# EAGLE board PCB-CCU-IRISCTRL_ETHERMEGA (EAGLE 7.1.0)
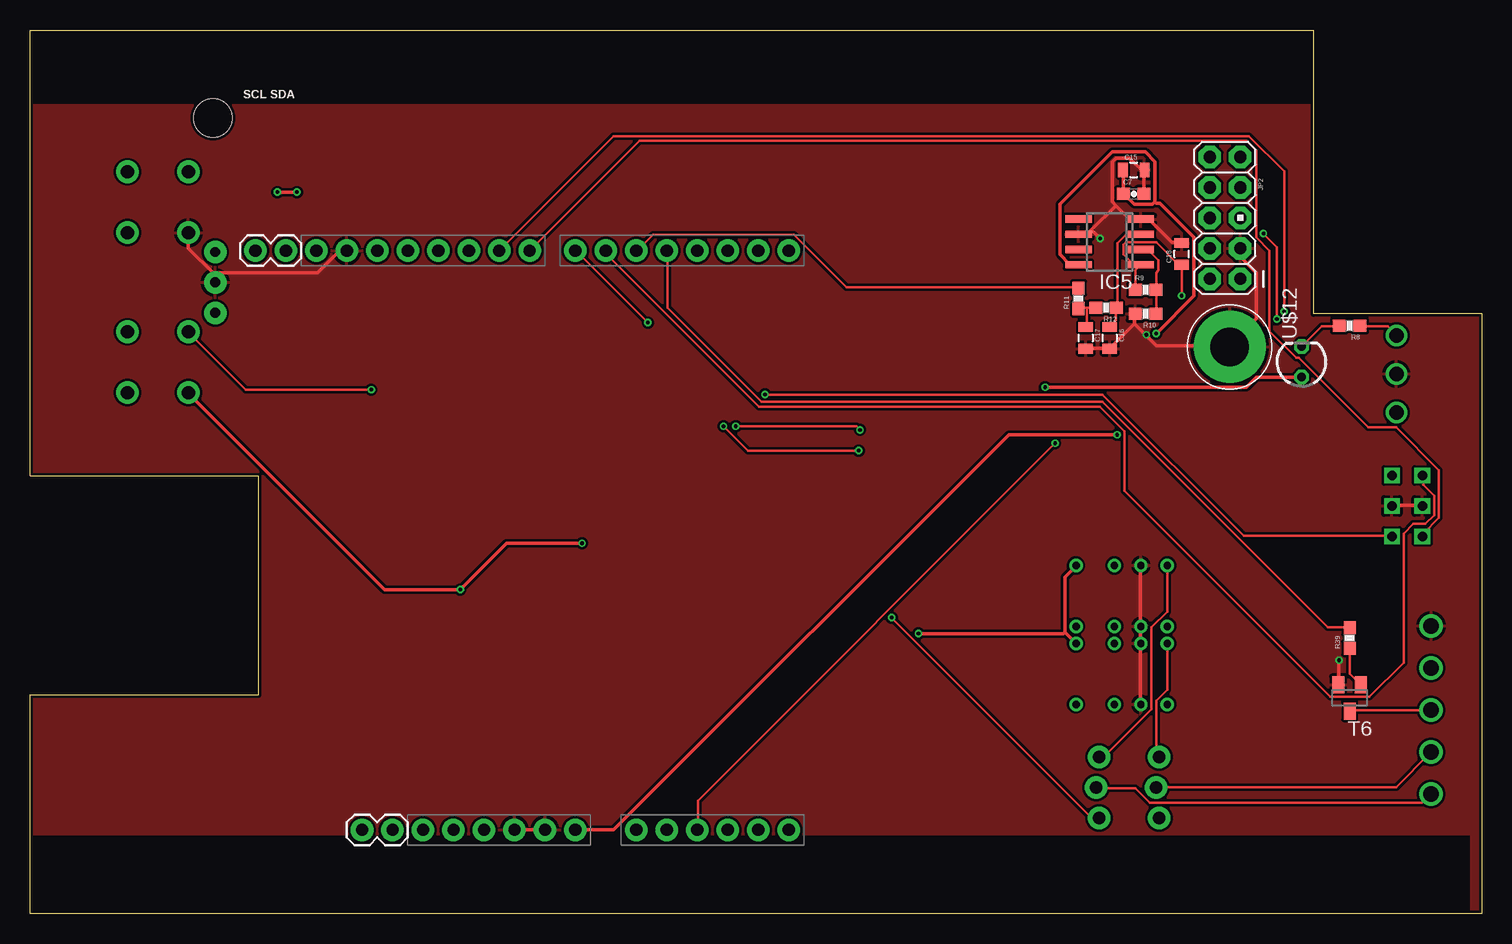
[diagram p0: board, top side]
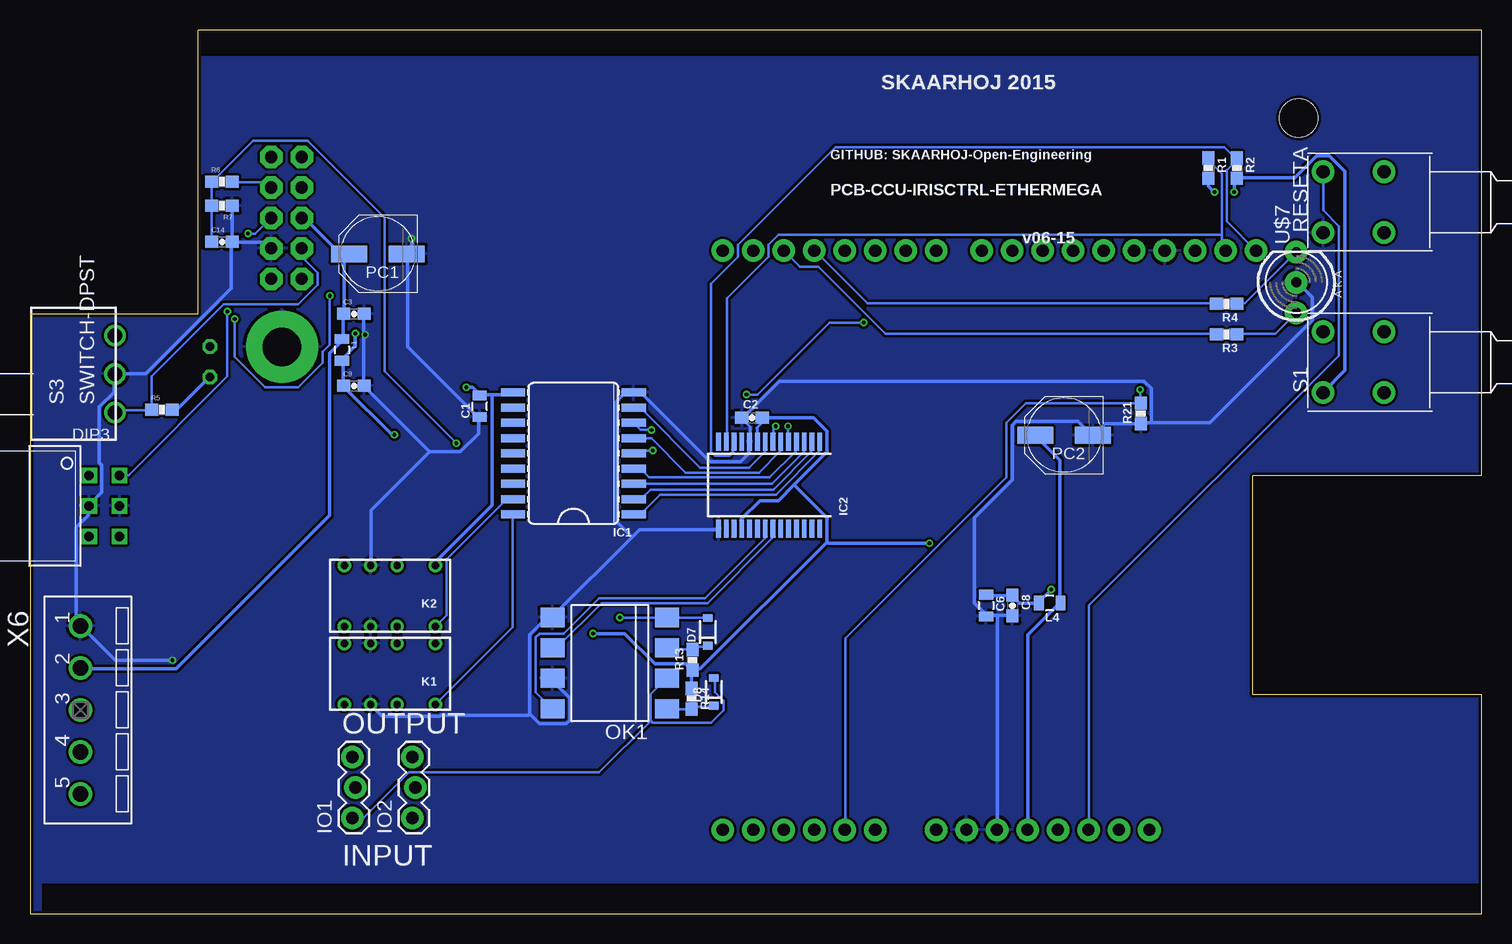
[diagram p1: board, bottom side, seen from below]

Size 121 x 73.66 mm. Coordinates in mm from the lower left corner, seen from the top.
Outline: 0,0 0,18.26 19.05,18.26 19.05,36.5 0,36.5 0,73.66 107,73.66 107,50 121,50 121,0 0,0
Copper layers (1*16): Top 0.035mm / dielectric 1.5mm / Bottom 0.035mm
Design rules "Fusion_eagle_rule_v1.1": minimum track width 6mil, minimum drill 12mil, track to track 6mil, track to pad 6mil, pad to pad 6mil, via to via 6mil, smd to smd 0mil, copper to edge 10mil, drill to drill 10mil, minimum pad ring 10mil, minimum via ring 6mil, stop-mask expansion 2mil, vias tented up to drill 100mil, thermal gap 10mil
Net classes: 0 default: width 0.203 mm, clearance 0.203 mm; 1 Power: width 0.305 mm, drill 0.305 mm, clearance 0.203 mm; 2 RELAY LINES: width 0.305 mm, drill 0.305 mm, clearance 0.203 mm; 3 INput lines: width 0.203 mm, clearance 0.203 mm
Holes 3.2 mm at 15.24,66.31
tRestrict: area 0,0 to 120,6.5; area 0,67.5 to 107,74
bRestrict: area 0,71.5 to 107,74; area 0,0 to 120,2.5

## Footprints (pad centres in the part's own frame; a part is rotated, then mirrored left to right if it is on the bottom)
0805 = smd 0.8 x 1.2: 1 -0.9,0; 2 0.9,0
0603-CAP = smd 1.1 x 1: 1 -0.85,0; 2 0.85,0
SOD-323 = smd 0.63 x 0.83: 1 -1.15,0; 2 1.15,0
P65SMT_UPRIGHT_TH = drill 0.8 square: P$1 -2.54,-1.27; P$2 0,-1.27; P$3 2.54,-1.27; P$4 2.54,1.27; P$5 0,1.27; P$6 -2.54,1.27
DUEMILANOVE_VIAS = drill 1.016 pad 1.88: 3.3V 50.8,13.97; 5V 50.8,16.51; A0 50.8,29.21; A1 50.8,31.75; A2 50.8,34.29; A3 50.8,36.83; A4 50.8,39.37; A5 50.8,41.91; AREF 2.54,2.54; D2 2.54,36.83; D3 2.54,34.29; D4 2.54,31.75; D5 2.54,29.21; D6 2.54,26.67; D7 2.54,24.13; D8 2.54,20.32; D9 2.54,17.78; D10 2.54,15.24; D11 2.54,12.7; D12 2.54,10.16; D13 2.54,7.62; GND@0 50.8,19.05; GND@1 50.8,21.59; GND@2 2.54,5.08; RES 50.8,11.43; RX 2.54,41.91; TX 2.54,39.37; VIN 50.8,24.13
SO18W = smd 0.66 x 2.032: 1 -5.08,-5.029; 2 -3.81,-5.029; 3 -2.54,-5.029; 4 -1.27,-5.029; 5 0,-5.029; 6 1.27,-5.029; 7 2.54,-5.029; 8 3.81,-5.029; 9 5.08,-5.029; 10 5.08,5.029; 11 3.81,5.029; 12 2.54,5.029; 13 1.27,5.029; 14 0,5.029; 15 -1.27,5.029; 16 -2.54,5.029; 17 -3.81,5.029; 18 -5.08,5.029
SSOP28 = smd 0.4 x 1.5: 1 -4.225,-3.625; 2 -3.575,-3.625; 3 -2.925,-3.625; 4 -2.275,-3.625; 5 -1.625,-3.625; 6 -0.975,-3.625; 7 -0.325,-3.625; 8 0.325,-3.625; 9 0.975,-3.625; 10 1.625,-3.625; 11 2.275,-3.625; 12 2.925,-3.625; 13 3.575,-3.625; 14 4.225,-3.625; 15 4.225,3.625; 16 3.575,3.625; 17 2.925,3.625; 18 2.275,3.625; 19 1.625,3.625; 20 0.975,3.625; 21 0.325,3.625; 22 -0.325,3.625; 23 -0.975,3.625; 24 -1.625,3.625; 25 -2.275,3.625; 26 -2.925,3.625; 27 -3.575,3.625; 28 -4.225,3.625
SO08 = smd 0.6 x 2.2: 1 -1.905,-2.6; 2 -0.635,-2.6; 3 0.635,-2.6; 4 1.905,-2.6; 5 1.905,2.6; 6 0.635,2.6; 7 -0.635,2.6; 8 -1.905,2.6
1X03_LOCK = drill 1.016 pad 1.88: 1 0,0.127; 2 2.54,-0.127; 3 5.08,0.127
1X02 = drill 1.016 pad 1.88: 1 0,0; 2 2.54,0
AVR_ICSP = drill 1.016 pad 1.88 octagon: 1 -1.27,5.08; 2 1.27,5.08; 3 -1.27,2.54; 4 1.27,2.54; 5 -1.27,0; 6 1.27,0; 7 -1.27,-2.54; 8 1.27,-2.54; 9 -1.27,-5.08; 10 1.27,-5.08
DS2Y = drill 0.6: 1 1.2,0.46; 16 1.2,5.54; O1 4.4,0.46; O2 4.4,5.54; P1 6.6,0.46; P2 6.6,5.54; S1 8.8,0.46; S2 8.8,5.54
DIL8-SMD = smd 1.6 x 2: 1 -3.81,-4.77; 2 -1.27,-4.77; 3 1.27,-4.77; 4 3.81,-4.77; 5 3.81,4.77; 6 1.27,4.77; 7 -1.27,4.77; 8 -3.81,4.77
PANASONIC_D = smd 3 x 1.4: + 2.4,0; - -2.4,0
0603-RES = smd 1.1 x 1: 1 -0.85,0; 2 0.85,0
PUSHBUTTON = drill 1.1 pad 1.88: 1 2.54,2.54; 2 2.54,-2.54; 3 -2.54,2.54; 4 -2.54,-2.54
TECONNECTIVITY-DPST = drill 1.2: P$1 3,3.2; P$2 3,0; P$3 3,-3.2
SOT23 = smd 1 x 1.4: 1 -0.95,-1.1; 2 0.95,-1.1; 3 0,1.1
3.2MMPAD6MM = drill 3.2 pad 6: P$1 0,0
LED5MM-BICOLOR = drill 0.813 pad 1.88: A2 2.54,0; A3 -2.54,0; K1 0,0
LED3MM = drill 0.7 pad 1.2 octagon: A -1.27,0; K 1.27,0
MSTBV5-3.5 = drill 1.3: 1 -7,0; 2 -3.5,0; 3 0,0; 4 3.5,0; 5 7,0

## Placement (x,y rotation side)
C1  100nF  [0805]  83.52,42.31 90 bottom
C2  100nF  [0603-CAP]  60.81,41.35 0 bottom
C3  100nF  [0603-CAP]  94,50 0 bottom
C6  22uF  [0805]  41.3,25.7 270 bottom
C7  100nF  [0603-CAP]  92,60 0 top
C8  100nF  [0603-CAP]  39.1,25.7 270 bottom
C9  100nF  [0603-CAP]  94,44 0 bottom
C14  100nF  [0603-CAP]  105,56 0 bottom
C15  10uF/25V  [0805]  92,62 0 top
C16  1uF  [0805]  90,48 270 top
C17  1uF  [0805]  88,48 270 top
C18  10uF  [0805]  96,55 90 top
D7  1N4148  [SOD-323]  64.5,23.5 90 bottom
D8  1N4148  [SOD-323]  64,18.5 90 bottom
DIP3  BINARY_DIPUPRIGHT  [P65SMT_UPRIGHT_TH]  114.8,34 270 bottom
GND  ARDUINO_SHIELDNO_SILK  [DUEMILANOVE_VIAS]  21.34,57.81 270 top
IC1  ULN2803A  [SO18W]  75.7,38.38 90 bottom
IC2  MCP23017SS  [SSOP28]  59.39,35.73 180 bottom
IC5  LM358D  [SO08]  90,56 90 top
IO1  [1X03_LOCK]  94,8 90 bottom
IO2  [1X03_LOCK]  89,8 90 bottom
JP1  [1X02]  27.69,7.01 0 top
JP2  M05X2PTH  [AVR_ICSP]  99.62,58 180 top
JP4  [1X02]  21.34,55.27 180 top
K1  RELAY5VIM03  [DS2Y]  86,23 180 bottom
K2  RELAY5VIM03  [DS2Y]  86,29.5 180 bottom
L1  ILHB0805ER121V  [0805]  95,47 270 bottom
L4  ILHB0805ER121V  [0805]  36,25.9 180 bottom
OK1  LTV826S  [DIL8-SMD]  72.67,20.9 90 bottom
PC1  47u  [PANASONIC_D]  92,55 180 bottom
PC2  47u  [PANASONIC_D]  34.8,39.9 180 bottom
R1  1K5  [0603-RES]  22.77,62.15 270 bottom
R2  1K5  [0603-RES]  20.4,62.15 270 bottom
R3  270  [0603-RES]  21.24,48.29 180 bottom
R4  270  [0603-RES]  21.24,50.83 180 bottom
R5  10K  [0603-RES]  110,42 0 bottom
R6  15K  [0603-RES]  105,61 0 bottom
R7  10K  [0603-RES]  105,59 180 bottom
R8  330R  [0603-RES]  110,49 180 top
R9  12K5  [0603-RES]  93,52 0 top
R10  22K  [0603-RES]  93,50 180 top
R11  22K  [0603-RES]  87.4,51.3 90 top
R12  10K  [0603-RES]  89.7,50.5 180 top
R13  330R  [0603-RES]  65.76,21.18 90 bottom
R14  330R  [0603-RES]  65.86,17.93 270 bottom
R21  10K  [0603-RES]  28.41,41.72 90 bottom
R39  10K  [0603-RES]  110,23 90 top
RESETA  [PUSHBUTTON]  10.67,59.31 90 bottom
S1  [PUSHBUTTON]  10.67,45.97 90 bottom
S3  SWITCH-DPST  [TECONNECTIVITY-DPST]  116.9,45 0 bottom
T6  BC847  [SOT23]  110,18 180 top
U$4  GNDPAD6MM  [3.2MMPAD6MM]  100,47.25 0 top
U$7  LEDBICOLOR-AKA  [LED5MM-BICOLOR]  15.44,52.63 90 bottom
U$12  LED3MM  [LED3MM]  106,46 90 top
X6  MSTBV53.5MM  [MSTBV5-3.5]  116.8,17 270 bottom

## Library data of the parts
C1-C3 C6-C9 C14-C18 GND IO1 IO2 JP1 JP2 JP4 L1 L4 R1-R14 R21 R39 = SparkFun
D7 D8 = SparkFun-DiscreteSemi; PROD_ID: DIO-09646
DIP3 K1 K2 RESETA S1 S3 U$4 U$7 U$12 X6 = SKAARHOJ
IC1 = uln-udn
IC2 = microchip; MF: MICROCHIP; MPN: MCP23017-E/SS; OC_FARNELL: 1467674; OC_NEWARK: 31K2960
IC5 = linear
OK1 = optocoupler; OC_FARNELL: unknown; OC_NEWARK: unknown
PC1 PC2 = rcl
T6 = transistor

## Nets
5V [Power]: C1.2 C2.2 C6.1 C8.1 IC1.10 IC2.9 IC2.18 K1.1 K2.1 L4.2 R1.2 R2.2 R5.2 R13.1 R14.1 S1.3 U$12.A
_IRIS_MANUAL: JP2.4 R5.1 S3.P$3
A1: IC2.16
A1CFG: GND.A1 R21.2 S1.1
A2: IC2.17
ADDR1: DIP3.P$1 GND.D6
ADDR2: DIP3.P$4 GND.D7
ADDR3: DIP3.P$3 GND.D8
ADDR4: DIP3.P$6 GND.D9
ARD_5V [Power]: GND.5V L4.1 PC2.+
D2: GND.D2 R3.2
D3: GND.D3 R4.2
FOLLOW_IRIS: C14.1 GND.A2 R6.1 R7.2
GND [Power]: C1.1 C2.1 C3.2 C6.2 C7.2 C8.2 C9.2 C14.2 C15.2 C16.2 C17.2 C18.2 DIP3.P$2 DIP3.P$5 GND.GND@0 GND.GND@1 GND.GND@2 IC1.9 IC2.10 IC2.15 IC5.4 IC5.6 JP2.3 K1.P1 K1.P2 K2.P1 K2.P2 OK1.5 OK1.7 PC1.- PC2.- R7.1 R10.2 R21.1 RESETA.3 S3.P$2 T6.2 U$4.P$1 U$7.K1 X6.1
I2C_SCL: IC2.12 JP4.2 R2.1
I2C_SDA: IC2.13 JP4.1 R1.1
IRIS_CONTROL: C18.1 IC5.1 JP2.5 R9.1
N$1: IO2.3 K2.S1
N$4: IC1.18 K1.16
N$5: IC1.1 IC2.1
N$6: IO2.2 X6.5
N$7: R4.1 U$7.A2
N$9: IC1.17 K2.16
N$10: IO1.3 K1.S1
N$11: R3.1 U$7.A3
N$12: IO1.2 X6.4
N$13: R39.1 T6.1
N$14: JP2.7 R6.2
N$15: R8.1 S3.P$1
N$16 [Power]: C3.1 JP2.6 L1.1 PC1.+ X6.2
N$17: R8.2 U$12.K
N$18: C17.1 R11.1 R12.2
N$20: C16.1 IC5.3 R12.1
N$22: IC5.2 R9.2 R10.1
N$34: IC1.2 IC2.2
N$35: IC1.3 IC2.3
N$36: IC1.4 IC2.4
N$37: IC1.5 IC2.5
N$38: IC1.6 IC2.6
N$39: IC1.7 IC2.7
N$40: IC1.8 IC2.8
N$47: D7.1 OK1.3 R13.2
N$48: D8.1 OK1.1 R14.2
N$49 [INput lines]: D8.2 IO1.1 OK1.2
N$51: IC2.21 OK1.8
N$60 [INput lines]: D7.2 IO2.1 OK1.4
N$68: IC2.22 OK1.6
PRV_TALLY: GND.D4 R39.2
PWM_IRIS: GND.D5 R11.2
RES: GND.RES RESETA.1
RESET: T6.3 X6.3
VIN [Power]: C7.1 C9.1 C15.1 GND.VIN IC5.8 L1.2

## Tracks (layer width: path | path; a pad name or v marks a point on that pad's centre or on a via)
5V  (via drill 0.3)
  Top 0.305: 86.26,23.47 87.17,22.55 K1.1 | 86.26,23.47 86.26,28.04 87.17,28.96 K2.1 | v84.63,43.89 101.4,43.89 102.21,44.7 105.97,44.7 U$12.A | v20.62,60.15 v22.25,60.15 | S1.3 13.21,43.38 29.57,27.03 v35.87,27.03 39.73,30.89 v46.02,30.89 | v74.07,23.37 86.16,23.37 86.26,23.47
  Bottom 0.254: C2.2 59.96,40.94 60.4,40.5 60.4,39.39 IC2.9
  Bottom 0.305: R5.2 109.12,42.06 108.71,42.06 106.07,44.7 U$12.A | 82.5,43.28 80.87,43.28 80.77,43.38 IC1.10 | 82.5,43.28 83.52,43.28 C1.2 83.62,43.38 84.12,43.89 v84.63,43.89 | 82.5,43.28 82.5,34.04 87.17,29.36 87.17,29.06 K2.1 | R14.1 65.84,18.8 65.84,20.32 R13.1 | 57.3,35.76 54.56,38.51 54.56,40.23 55.68,41.35 59.84,41.35 C2.2 | 57.3,35.76 58.62,34.44 60.15,34.44 61.67,32.92 IC2.18 | 54.56,30.99 65.13,20.42 65.63,20.42 R13.1 | 54.56,30.99 54.56,33.02 57.3,35.76 | C6.1 41.25,26.52 39.12,26.52 C8.1 39.01,26.42 38.51,25.91 36.98,25.91 L4.2 36.88,26.01 v35.87,27.03 | S1.3 13.21,43.48 11.38,45.31 11.38,61.87 12.7,63.2 13.72,63.2 15.54,61.37 20.32,61.37 R2.2 20.42,61.16 20.62,60.96 v20.62,60.15 | v22.25,60.15 22.76,60.66 22.76,61.27 R1.2 | v46.02,30.89 54.46,30.89 54.56,30.99 | v74.07,23.37 71.42,23.37 68.89,20.83 66.34,20.83 65.94,20.42 R13.1
_IRIS_MANUAL
  Bottom 0.203: S3.P$3 113.89,41.86 113.79,41.96 110.95,41.96 R5.1 110.85,42.06 110.85,44.81 104.85,50.8 98.65,50.8 97.03,52.43 97.03,53.44 98.35,54.76 98.35,55.37 JP2.4
A1CFG  (via drill 0.3)
  Top 0.203: v28.45,43.69 17.98,43.69 13.21,48.46 S1.1
  Bottom 0.203: v28.45,43.69 28.45,42.57 R21.2 28.55,42.57 38,42.57 39.62,40.95 39.62,36.37 53.03,22.96 53.03,7.01 GND.A1
ADDR1
  Top 0.203: DIP3.P$1 116.13,36.47 116.13,35.76 117.04,34.85 117.04,33.22 116.33,32.51 115.32,32.51 114.5,31.7 114.5,20.93 111.66,18.09 108.41,18.09 91.24,35.26 91.24,40.23 89.2,42.27 60.76,42.27 48.06,54.97 48.06,55.27 GND.D6
ADDR2  (via drill 0.3)
  Top 0.203: v61.27,43.28 89.41,43.28 101.19,31.5 113.49,31.5 DIP3.P$4 | v51.51,49.28 45.52,55.27 GND.D7
  Bottom 0.203: v61.27,43.28 60.35,43.28 54.36,49.28 v51.51,49.28
ADDR3
  Top 0.203: GND.D8 50.8,64.41 101.4,64.41 102.21,63.6 102.21,56.39 103.33,55.27 103.33,48.56 105.56,46.33 105.77,46.33 111.56,40.54 113.89,40.54 117.45,36.98 117.45,33.02 116.13,31.7 116.13,31.5 DIP3.P$3
ADDR4  (via drill 0.3)
  Top 0.203: v104.55,50.19 104.55,61.87 101.6,64.82 48.67,64.82 GND.D9
  Bottom 0.203: v104.55,50.19 104.55,44.81 112.78,36.58 113.49,36.58 DIP3.P$6
ARD_5V
  Bottom 0.305: PC2.+ 37.19,39.83 35.15,37.8 35.15,25.91 L4.1 35.26,25.81 37.8,23.27 37.8,7.01 GND.5V
D2
  Bottom 0.203: R3.2 22.15,48.36 49.68,48.36 55.27,53.95 56.79,53.95 58.12,55.27 GND.D2
D3
  Bottom 0.203: R4.2 22.15,50.9 51.21,50.9 55.58,55.27 GND.D3
FOLLOW_IRIS  (via drill 0.3)
  Top 0.203: v85.45,39.22 55.68,9.45 55.68,7.01 GND.A2
  Bottom 0.203: C14.1 105.87,56.08 105.87,58.93 R7.2 105.87,59.03 105.87,60.96 R6.1 105.77,61.06 102.41,64.41 97.84,64.41 91.44,58.01 91.44,45.21 v85.45,39.22
GND  (via drill 0.3)
  Top 0.305: GND.GND@0 GND.GND@1 | RESETA.3 13.21,55.47 15.34,53.34 15.34,52.63 U$7.K1 15.44,53.44 23.98,53.44 25.81,55.27 GND.GND@2 | DIP3.P$5 113.59,34.04 116.03,34.04 DIP3.P$2 | v109.12,21.13 109.12,19.1 T6.2 | 92.05,49.17 92.05,49.99 R10.2 | 92.05,49.17 90.02,47.14 C16.2 89.92,47.14 88.09,47.14 C17.2 | 93.02,48.21 93.88,47.35 99.97,47.35 U$4.P$1 100.08,47.45 102.21,49.58 102.21,53.44 100.99,54.66 100.99,55.37 JP2.3 | 93.02,48.21 92.05,49.17 | C7.2 92.86,60.05 92.86,61.98 C15.2 92.76,62.08 92.56,62.08 91.64,62.99 90.53,62.99 90.22,62.69 90.22,59.33 90.53,59.03 | C18.2 95.91,55.98 95.2,55.98 93.37,57.81 92.66,57.81 IC5.4 92.46,57.91 91.64,57.91 90.53,59.03 | 90.53,59.03 88.49,57 | 88.49,57 88.19,56.69 87.48,56.69 IC5.6 | K1.P2 92.56,17.48 92.56,22.45 K1.P1 92.56,22.66 92.56,23.88 K2.P2 92.56,24.08 92.56,28.96 K2.P1 | v89.2,56.29 88.49,57 | v93.07,48.26 93.02,48.21
  Bottom 0.254: C2.1 61.66,41.26 61,40.6 61,39.37 IC2.10
  Bottom 0.305: 40.34,24.89 41.25,24.89 C6.2 41.35,24.99 42.27,25.91 42.27,33.02 39.12,36.17 39.12,40.74 38.81,41.05 33.63,41.05 32.51,39.93 PC2.- 32.31,39.93 31.39,40.84 28.45,40.84 R21.1 28.35,40.95 27.53,40.95 | 40.34,24.89 39.12,24.89 C8.2 | 40.34,24.89 40.34,7.01 GND.GND@0 | 27.53,40.95 22.66,40.95 14.12,49.48 14.12,51.41 15.34,52.63 U$7.K1 | v109.12,21.13 113.89,21.13 116.74,23.98 X6.1 116.84,24.08 117.14,24.38 117.14,32.21 116.13,33.22 116.13,33.93 DIP3.P$2 116.03,34.14 115.01,35.15 115.01,37.39 115.21,37.59 115.21,42.27 114,43.48 114,44.91 S3.P$2 113.79,45.01 111.35,45.01 104.24,52.12 104.24,55.88 C14.2 | C14.2 104.14,56.08 104.14,58.93 R7.1 | C14.2 104.04,55.98 101.5,55.98 100.99,55.47 JP2.3 | 70.81,31.39 77.42,24.79 OK1.5 77.52,24.59 78.03,24.59 79.35,23.27 79.35,16.66 | 70.81,31.39 70.21,32 63.7,32 IC2.15 | 79.35,16.66 78.54,15.85 76.3,15.85 76,16.15 76,17.98 77.42,19.41 77.42,19.61 OK1.7 | 70.81,31.39 72.14,32.72 72.14,42.67 71.42,43.38 70.71,43.38 IC1.9 70.61,43.28 69.9,43.28 64.31,37.69 61.77,37.69 61.06,38.41 61.06,39.32 IC2.10 | 93.17,48.26 93.17,49.99 C3.2 | 93.17,48.26 93.17,44.09 C9.2 93.07,43.89 87.68,38.51 | 87.68,38.51 85.14,38.51 83.62,40.03 83.62,41.35 C1.1 83.72,41.45 89.51,47.24 89.51,54.97 PC1.- 89.41,55.07 89.2,55.27 v89.2,56.29 | 87.68,38.51 92.56,33.63 92.56,29.06 K2.P1 | 79.35,16.66 79.45,16.56 86.77,16.56 86.87,16.46 91.64,16.46 92.56,17.37 K1.P2 | v93.07,48.26 93.17,48.26 | 27.53,40.95 27.53,43.79 28.14,44.4 58.52,44.4 61.57,41.35 C2.1
  pour Top: 0,0 121,0 121,74 0,74
  pour Bottom: 0,0 121,0 121,74 0,74
I2C_SCL
  Bottom 0.203: JP4.2 21.23,57.71 21.23,61.98 20.42,62.79 20.42,62.99 R2.1 20.52,62.99 21.44,63.91 53.85,63.91 61.98,55.78 61.98,54.76 64.21,52.53 64.21,38.51 63.91,38.2 62.69,38.2 62.38,38.51 62.38,39.32 IC2.12
I2C_SDA
  Bottom 0.203: 21.64,56.59 21.64,55.58 JP4.1 | 21.64,56.59 21.64,61.67 22.76,62.79 22.76,62.99 R1.1 | 21.64,56.59 58.62,56.59 59.44,55.78 59.44,54.76 62.89,51.31 62.89,39.42 IC2.13
IRIS_CONTROL  (via drill 0.3)
  Top 0.203: R9.1 92.15,52.02 92.15,53.65 92.56,54.05 IC5.1 92.25,53.85 91.14,54.97 91.14,55.78 91.34,55.98 93.88,55.98 95.71,54.15 95.91,54.15 C18.1 96.01,54.05 v96.01,51.51 | v103.94,49.58 103.94,55.58 v102.82,56.69
  Bottom 0.203: v96.01,51.51 96.01,47.45 96.62,46.84 96.62,45.92 98.65,43.89 101.4,43.89 103.94,46.43 v103.94,49.58 | v102.82,56.69 102.21,56.69 100.99,57.91 JP2.5
N$1
  Top 0.203: K2.S1 94.79,28.96 94.79,25.2 93.47,23.88 93.47,17.07 89.51,13.11 89.2,13.11 IO2.3
N$4
  Bottom 0.203: IC1.18 80.77,33.22 80.77,23.88 87.17,17.48 K1.16
N$5
  Bottom 0.203: IC2.1 55.17,39.32 55.17,38.61 58.83,34.95 68.48,34.95 70.1,33.33 70.61,33.33 IC1.1
N$6
  Top 0.203: IO2.2 88.9,10.46 92.15,10.46 93.37,9.25 116.03,9.25 116.74,9.96 X6.5
N$7
  Bottom 0.203: R4.1 20.32,50.9 19.71,50.9 U$7.A2
N$9
  Bottom 0.203: IC1.17 80.77,34.54 81.28,34.54 86.26,29.57 86.26,24.89 87.17,23.98 K2.16
N$10
  Top 0.203: K1.S1 94.79,22.45 94.79,18.69 93.88,17.78 93.88,13.31 94.08,13.11 IO1.3
N$11
  Bottom 0.203: R3.1 20.32,48.36 17.17,48.36 U$7.A3
N$12
  Top 0.203: IO1.2 93.88,10.57 113.89,10.57 116.74,13.41 X6.4
N$13
  Top 0.203: R39.1 110.03,22.15 110.03,20.02 T6.1
N$14
  Bottom 0.203: R6.2 104.14,60.96 101.4,60.96 100.99,60.55 JP2.7
N$15
  Top 0.203: R8.1 110.95,48.97 113.18,48.97 113.89,48.26 S3.P$1
N$16
  Bottom 0.305: JP2.6 98.35,57.91 98.04,57.91 94.89,54.76 PC1.+ 94.49,54.97 94.79,54.66 94.79,50.09 C3.1 94.89,49.99 94.89,48.06 95,47.95 L1.1 95,47.75 96.01,46.74 96.01,33.22 108.81,20.42 116.74,20.42 X6.2
N$17
  Top 0.203: R8.2 109.12,48.97 107.7,48.97 106.07,47.35 U$12.K
N$18
  Top 0.203: 88.09,50.49 88.8,50.49 R12.2 | 88.09,50.49 87.48,50.49 R11.1 | 88.09,50.49 88.09,48.97 C17.1
N$20
  Top 0.203: C16.1 90.02,48.97 90.53,49.48 90.53,50.49 R12.1 90.63,50.6 90.63,55.88 91.34,56.59 92.56,56.59 IC5.3
N$22
  Top 0.203: R10.1 93.88,50.09 93.88,51.92 R9.2 93.88,52.02 93.88,53.44 94.08,53.65 94.08,54.46 93.27,55.27 92.66,55.27 IC5.2
N$34
  Bottom 0.203: IC2.2 55.88,39.32 55.88,38.51 59.03,35.36 69.29,35.36 70,34.65 70.61,34.65 IC1.2
N$35
  Bottom 0.203: IC2.3 56.49,39.32 56.49,38.51 59.13,35.87 70.61,35.87 IC1.3
N$36
  Bottom 0.203: IC2.4 57.2,39.32 57.2,38.51 59.33,36.37 69.39,36.37 70.1,37.08 70.61,37.08 IC1.4
N$37  (via drill 0.3)
  Top 0.203: v57.81,40.64 59.84,38.61 v69.09,38.61
  Bottom 0.203: v57.81,40.64 57.81,39.42 IC2.5 | v69.09,38.61 70.41,38.61 70.61,38.41 IC1.5
N$38
  Bottom 0.203: IC2.6 58.42,39.32 58.42,38.61 60.25,36.78 66.34,36.78 69.19,39.62 70.61,39.62 IC1.6
N$39  (via drill 0.3)
  Top 0.203: v58.83,40.64 68.89,40.64 v69.19,40.34
  Bottom 0.203: v58.83,40.64 59.03,40.44 59.03,39.42 IC2.7 | v69.19,40.34 70.1,40.34 70.61,40.84 IC1.7
N$40
  Bottom 0.203: IC2.8 59.74,39.32 59.74,38.51 61.06,37.19 65.13,37.19 70.1,42.16 70.61,42.16 IC1.8
N$47
  Bottom 0.203: D7.1 64.52,22.25 65.53,22.25 65.73,22.05 R13.2 65.84,22.05 67.77,22.05 67.87,22.15 OK1.3
N$48
  Bottom 0.203: D8.1 64.01,17.27 65.73,17.27 65.84,17.17 R14.2 65.94,17.07 67.87,17.07 OK1.1
N$49
  Bottom 0.203: 69.24,16.1 69.29,16.15 69.29,18.29 67.97,19.61 OK1.2 | 69.24,16.1 69.09,15.95 64.21,15.95 63.2,16.97 63.2,17.78 63.91,18.49 63.91,19.61 D8.2 | 69.24,16.1 73.56,11.79 89.41,11.79 93.17,8.03 94.08,8.03 IO1.1
N$51
  Bottom 0.203: IC2.21 59.74,32 59.74,31.29 64.72,26.31 73.56,26.31 76.5,23.37 78.54,23.37 78.84,23.06 78.84,18.49 77.52,17.17 OK1.8
N$60  (via drill 0.3)
  Top 0.203: v71.83,24.69 88.49,8.03 89.1,8.03 IO2.1
  Bottom 0.203: D7.2 64.52,24.69 67.87,24.69 OK1.4 67.97,24.69 v71.83,24.69
N$68
  Bottom 0.203: IC2.22 59.13,32 59.13,31.29 64.52,25.91 73.36,25.91 77.01,22.25 77.42,22.25 OK1.6
PRV_TALLY
  Top 0.203: R39.2 109.93,23.88 108.2,23.88 89.41,42.67 60.96,42.67 53.14,50.49 53.14,55.27 GND.D4
PWM_IRIS
  Top 0.203: R11.2 87.38,52.22 68.07,52.22 63.7,56.59 51.92,56.59 50.6,55.27 GND.D5
RES
  Bottom 0.203: RESETA.1 13.21,58.62 11.89,57.3 11.89,46.53 32.72,25.7 32.72,7.01 GND.RES
RESET
  Top 0.203: T6.3 110.03,16.97 116.74,16.97 X6.3
VIN  (via drill 0.3)
  Top 0.305: C15.1 91.14,61.98 91.14,60.05 C7.1 91.24,59.94 92.05,59.13 93.57,59.13 93.78,59.33 | 93.78,59.33 93.78,62.69 92.96,63.5 90.22,63.5 85.85,59.13 85.85,54.97 86.67,54.15 87.38,54.15 IC5.8 | v93.88,48.36 97.03,51.51 97.03,56.39 94.18,59.23 93.88,59.23 93.78,59.33 | GND.VIN 48.67,7.01 81.58,39.93 v90.63,39.93
  Bottom 0.305: v93.88,48.36 93.88,47.35 95,46.23 L1.2 95,46.02 94.89,45.92 94.89,44.09 C9.1 94.79,43.89 90.83,39.93 v90.63,39.93

## Text on the board
_tsilk: SCL SDA
_bsilk: SKAARHOJ 2015 | GITHUB: SKAARHOJ-Open-Engineering | PCB-CCU-IRISCTRL-ETHERMEGA | v06-15 | OUTPUT | INPUT